# Altium PCB Main_Board.PcbDoc (part 6 of 14)
Units mm, origin at the board's own origin, x right, y up, seen from the top; angles counter-clockwise.
Board outline 142 x 82 mm, 10 copper layers (L1_Top, L2_PWR1, L3_Sig1, L4_GND1, L5_Sig2, L6_Sig3, L7_GND2, L8_Sig4, L9_GND3, L8_Bottom), stack 1.71 mm thick; 299 components, 328 nets, 2329 pads, 2908 vias.
Unrouted connection lines stored in the file: 2.
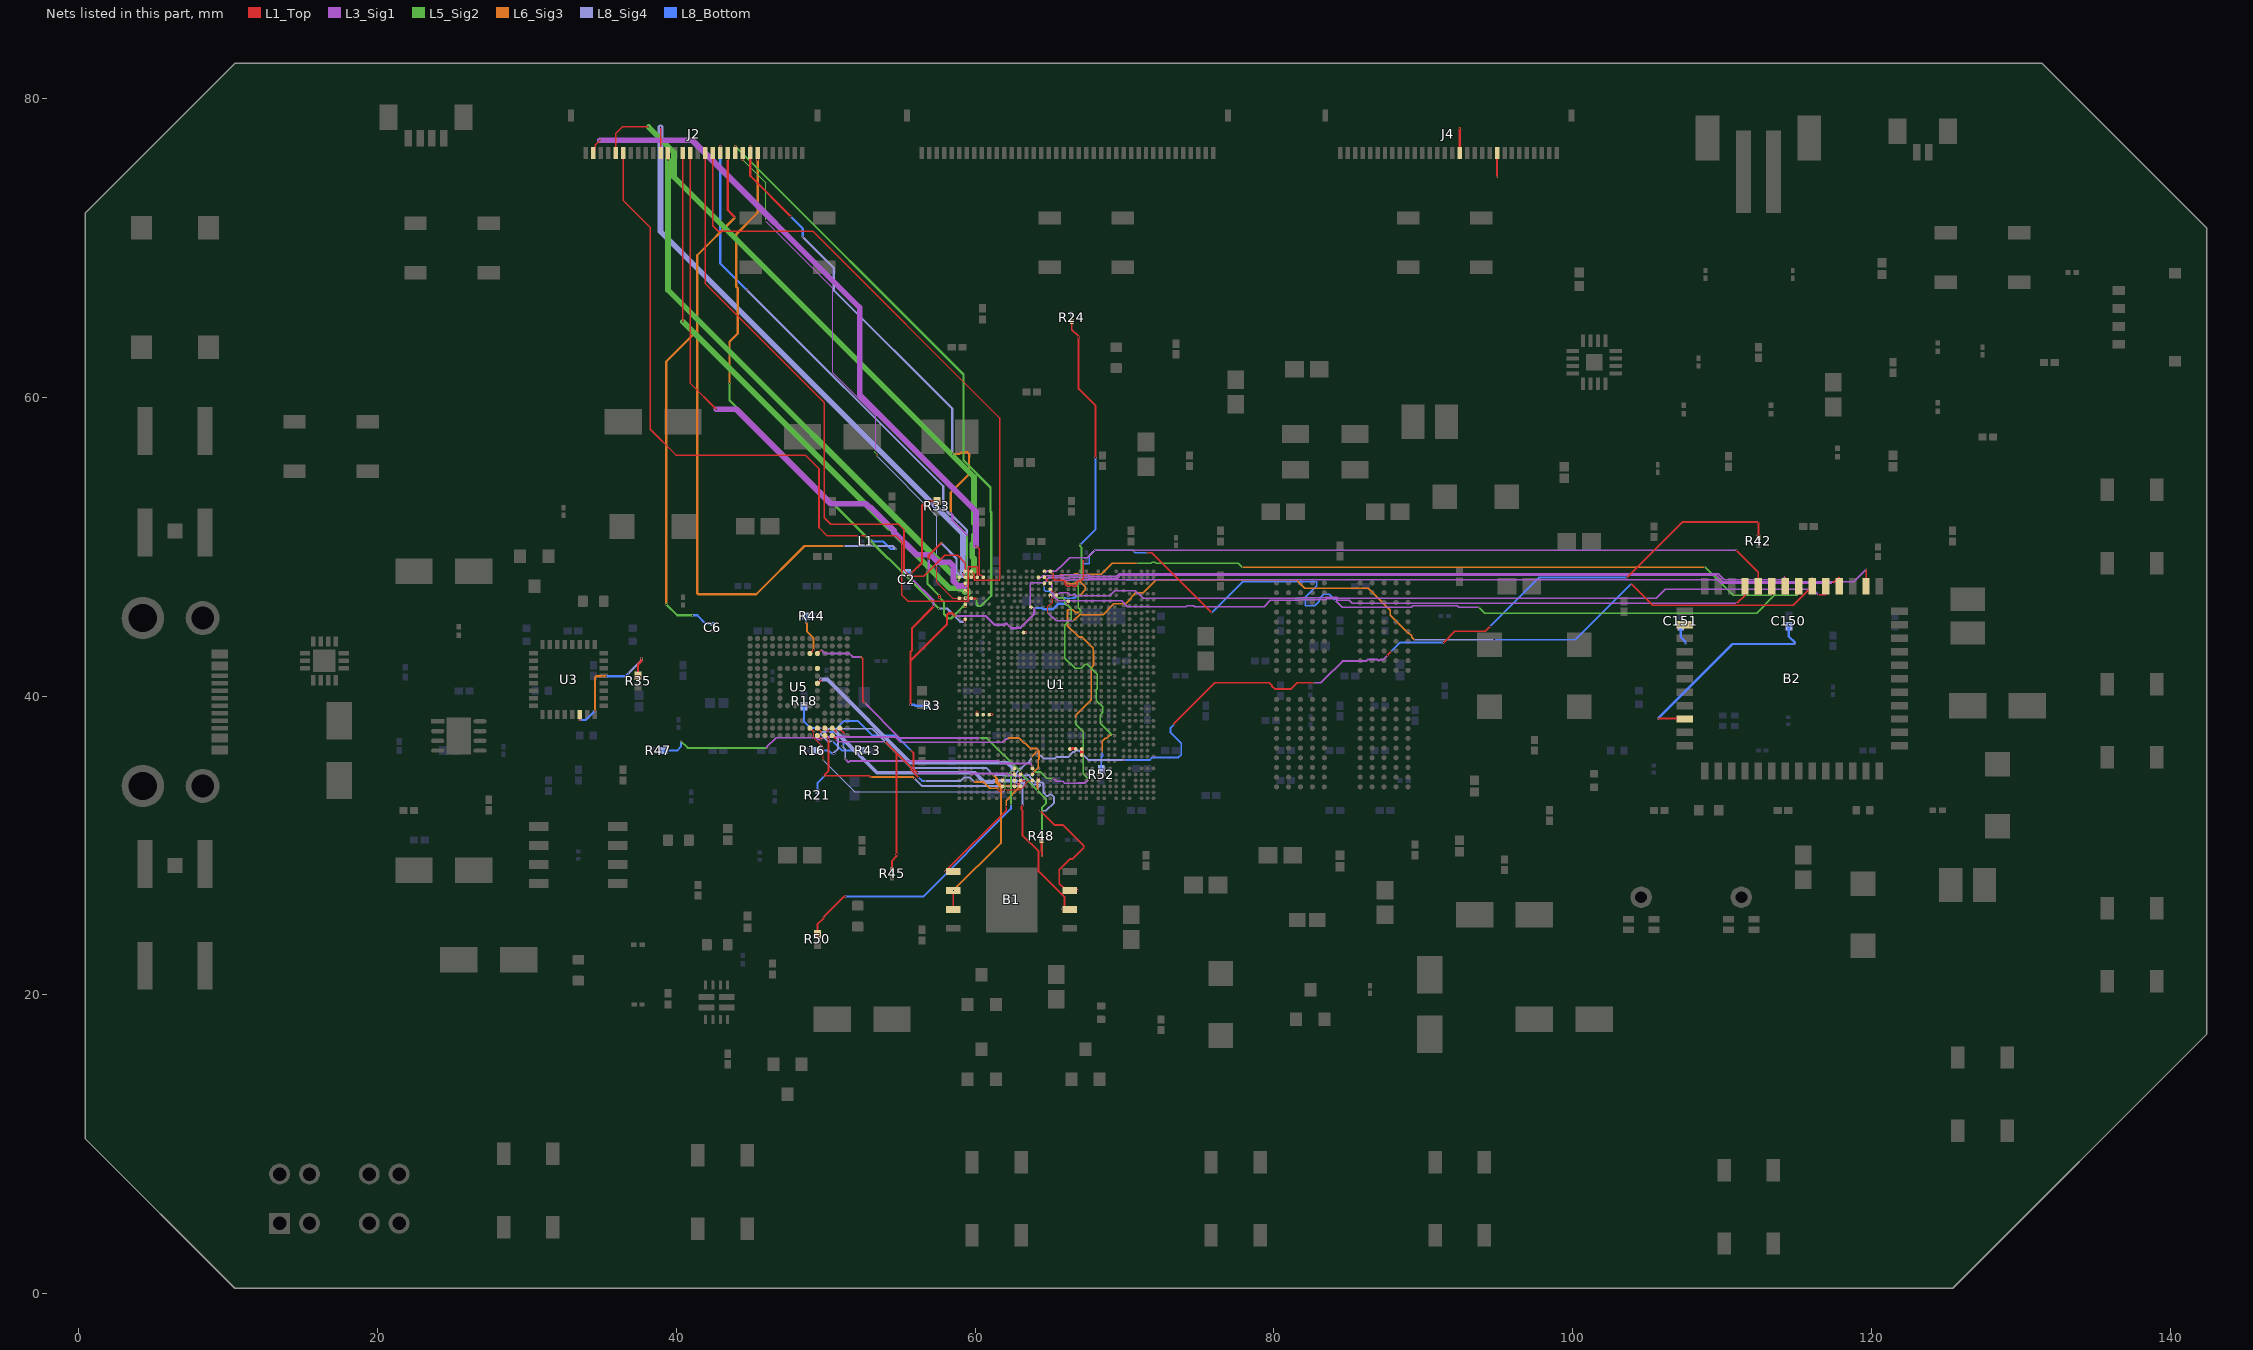
[diagram p14: the nets of this part, all layers, seen from the top]

## Footprints (in the part's own frame and the unit in brackets; to place one, negate y for a bottom-side part, rotate by r counter-clockwise, add the part's x,y. Pads: shape width x height; smd on the part's side, far side on the other; paste and mask are expansions set on the pad) (continued)
UFQFPN-32 [mm]
  rect 0.6x0.3 smd paste-0.15 mask+0: 1(-2.35,1.75) 2(-2.35,1.25) 3(-2.35,0.75) 4(-2.35,0.25) 5(-2.35,-0.25) 6(-2.35,-0.75) 7(-2.35,-1.25) 8(-2.35,-1.75) 17(2.35,-1.75) 18(2.35,-1.25) 19(2.35,-0.75) 20(2.35,-0.25) 21(2.35,0.25) 22(2.35,0.75) 23(2.35,1.25) 24(2.35,1.75)
  rect 0.3x0.6 smd paste-0.15 mask+0: 9(-1.75,-2.35) 10(-1.25,-2.35) 11(-0.75,-2.35) 12(-0.25,-2.35) 13(0.25,-2.35) 14(0.75,-2.35) 15(1.25,-2.35) 16(1.75,-2.35) 25(1.75,2.35) 26(1.25,2.35) 27(0.75,2.35) 28(0.25,2.35) 29(-0.25,2.35) 30(-0.75,2.35) 31(-1.25,2.35) 32(-1.75,2.35)
  silkscreen extent -2.93,-3.16 3.16,3.16, body extent -2.6,-2.6 2.6,2.6, height 1.4

## Part data
*: library part CMP-019-00062-1, "Full Speed Programmable USB Power Delivery Controller USB 3.1 3.3V T/R 14-Pin WQFN EP", Max Operating Temperature=85°C, Max Supply Voltage=5.5V, Min Operating Temperature=-40°C, Min Supply Voltage=2.7V, Mounting Technology="Surface Mount"
B1: library part CMP-043-000000-2, "256M-bit Serial Flash Memory with uniform 4KB sectors and Dual/Quad SPI", Manufacturer_Name=Winbond, Mouser Part Number=454-W25Q256JVEIQ, Arrow Part Number=W25Q256JVEIQ, Arrow Price/Stock=https://www.arrow.com/en/products/w25q256jveiq/winbond-electronics.html?utm_currency=USD&region=nac, Datasheet Link=https://www.winbond.com/hq/search-resource-file.jsp?partNo=W25Q256JVEIQ&type=datasheet, Design Item ID=W25Q256JVEIQ, Geometry.Height=0.8mm, Manufacturer_Part_Number=W25Q256JVEIQ, Mouser Price/Stock=https://www.mouser.co.uk/ProductDetail/Winbond/W25Q256JVEIQ?qs=qSfuJ%252Bfl%2Fd4o%2FNFUf7yCgA%3D%3D, Source=W25Q256JVEIQ.SchLib
B2: library part CMP-052-000000-2, "IEEE 802.11ax/ac/a/b/g/n 2x2 WiFi with Bluetooth5.0 Combo Sip Module", Manufacturer_Name=SparkLAN, Datasheet Link=https://www.mev-elektronik.com/files/MEV%20Elektronik%20Service/produkt-downloads/rf-microwave-wireless/download_AP6275S_datasheet_ver1.0_20191129%20(1).pdf, Design Item ID=AP6275S, Geometry.Height=1.55mm, Manufacturer_Part_Number=AP6275S, Source=AP6275S.SchLib
C1 C128 C137: library part CMP-001-00067-3, "Chip Capacitor, 100nF +/-20%, 50V, 0402, Thickness 0.6 mm", Case/Package=0402, Max Operating Temperature=85°C, Min Operating Temperature=-55°C, Tolerance=10%, Voltage Rating=50V, Mounting Technology=SMT, Pins=2
C2: library part CMP-001-00066-3, "Chip Capacitor, 1nF +/-20%, 50V, 0402, Thickness 0.33 mm", Case/Package=0402, Max Operating Temperature=85°C, Min Operating Temperature=-55°C, Tolerance=10%, Voltage Rating=50V, Mounting Technology=SMT, Pins=2
C3: library part CMP-001-00103-1, "Cap Ceramic 0.0047uF 10V X5R 10% Pad SMD 0201 85C Automotive T/R", Case/Package=0201, Max Operating Temperature=85°C, Min Operating Temperature=-55°C, Tolerance=10%, Voltage Rating=10V, Mounting Technology="Surface Mount"
C4: library part CMP-001-00105-1, "10V 1uF X5R ±20% 0201 Multilayer Ceramic Capacitors MLCC - SMD/SMT ROHS", Case/Package=0201, Max Operating Temperature=85°C, Min Operating Temperature=-55°C, Tolerance=20%, Mounting Technology="Surface Mount"
C5 C13: library part CMP-001-00061-3, "Chip Capacitor, 100nF +/-20%, 10V, 0402, Thickness 0.6 mm", Case/Package=0402, Max Operating Temperature=85°C, Min Operating Temperature=-55°C, Tolerance=20%, Voltage Rating=10V, Mounting Technology=SMT, Pins=2
C6: library part CMP-001-00106-1, "50V 10pF C0G ±1% 0201 Multilayer Ceramic Capacitors MLCC - SMD/SMT ROHS", Case/Package=0201, Max Operating Temperature=125°C, Min Operating Temperature=-55°C, Tolerance=1%, Voltage Rating=50V, Mounting Technology="Surface Mount"
C7 C8: library part CMP-001-00063-3, "Chip Capacitor, 1µF +/-20%, 10V, 0402, Thickness 0.6 mm", Case/Package=0402, Max Operating Temperature=85°C, Min Operating Temperature=-55°C, Tolerance=10%, Voltage Rating=10V, Mounting Technology=SMT, Pins=2
C9: library part CMP-001-00104-1, "0201 (0603METRIC) Ceramic Capacitor SMD Comm C0G 25V 15PF ±5% C0G NP0", Case/Package=0201, Max Operating Temperature=125°C, Min Operating Temperature=-55°C, Tolerance=5%, Voltage Rating=25V, Mounting Technology="Surface Mount"
C10: library part CMP-001-00108-1, "10V 2.2uF X5R ±20% 0201 Multilayer Ceramic Capacitors MLCC - SMD/SMT ROHS", Case/Package=0201, Max Operating Temperature=85°C, Min Operating Temperature=-55°C, Voltage Rating=10V, Mounting Technology="Surface Mount"
C11 C12 C130 C138: library part CMP-001-00107-1, "0201 4.7 uF 6.3 V ±10 % Tolerance X5R SMT Multilayer Ceramic Chip Capacitor", Case/Package=0201, Max Operating Temperature=85°C, Min Operating Temperature=-55°C, Tolerance=20%, Voltage Rating=6.3V, Mounting Technology="Surface Mount"
C14 C15: library part CMP-001-00114-1, "CAP CER 12PF 50V C0G/NP0 0201 / 12 pF ±1% 50V Ceramic Capacitor C0G, NP0 0201 (0603 Metric)", Case/Package=0201, Max Operating Temperature=125°C, Min Operating Temperature=-55°C, Tolerance=1%, Voltage Rating=50V, Mounting Technology="Surface Mount"
C16 C26 C34 C35 C42 C57 C65 C73 C83 C91 C99 C107 C115 C124: library part CMP-001-00109-1, "CAP CER 10UF 4V X5R 0402 / 10 µF ±20% 4V Ceramic Capacitor X5R 0402 (1005 Metric)", Case/Package=0402, Max Operating Temperature=85°C, Min Operating Temperature=-55°C, Tolerance=20%, Voltage Rating=4V, Mounting Technology="Surface Mount"
C17 C18 C32 C33 C37 C44 C45 C46 C80 C131: library part CMP-001-00111-1, "10V 1uF X5R ±20% 0201 Multilayer Ceramic Capacitors MLCC - SMD/SMT ROHS", Case/Package=0201, Max Operating Temperature=85°C, Min Operating Temperature=-55°C, Tolerance=20%, Mounting Technology="Surface Mount"
C19 C20 C23 C27 C28 C29 C30 C31 C38 C39 C40 C47 C48 C49 C50 C51 C52 C53 C54 C58 C59 C60 C61 C62 C66 C67 C68 C69 C70 C74 C75 C76 C77 C78 C79 C84 C85 C86 C87 C88 C92 C93 C94 C95 C96 C100 C101 C102 C103 C104 C108 C109 C110 C111 C112 C116 C117 C118 C119 C120 C122 C123 C125 C132 C133 C142 C144 C149 C150 C151: library part CMP-001-00112-1, "16V 100nF X5R ±10% 0201 Multilayer Ceramic Capacitors MLCC - SMD/SMT ROHS", Case/Package=0201, Max Operating Temperature=85°C, Min Operating Temperature=-55°C, Tolerance=10%, Voltage Rating=16V, Mounting Technology="Surface Mount"
C21 C22 C36 C43: library part CMP-001-00110-1, "6.3V 4.7uF X5R ±20% 0402 Multilayer Ceramic Capacitors MLCC - SMD/SMT ROHS", Case/Package=0402, Max Operating Temperature=85°C, Min Operating Temperature=-55°C, Tolerance=20%, Voltage Rating=6.3V, Mounting Technology="Surface Mount"
C24 C25 C41 C55 C56 C63 C64 C71 C72 C81 C82 C89 C90 C97 C98 C105 C106 C113 C114: library part CMP-001-00097-1, "6.3V 22uF X5R ±20% 0603 Multilayer Ceramic Capacitors MLCC - SMD/SMT ROHS", Case/Package=0603, Max Operating Temperature=85°C, Min Operating Temperature=-55°C, Tolerance=20%, Voltage Rating=6.3V, Mounting Technology="Surface Mount"
C121: library part CMP-001-00115-1, "10V 2.2uF X5R ±20% 0201 Multilayer Ceramic Capacitors MLCC - SMD/SMT ROHS", Case/Package=0201, Max Operating Temperature=85°C, Min Operating Temperature=-55°C, Voltage Rating=10V, Mounting Technology="Surface Mount"
C126 C127: library part CMP-001-00102-1, "25V 22pF C0G ±1% 0201 Multilayer Ceramic Capacitors MLCC - SMD/SMT ROHS", Case/Package=0201, Max Operating Temperature=125°C, Min Operating Temperature=-55°C, Tolerance=1%, Voltage Rating=25V, Mounting Technology="Surface Mount"
C129 C141 C143: library part CMP-001-00074-3, "Chip Capacitor, 10µF +/-40%, 6.3V, 0402, Thickness 0.6 mm", Case/Package=0402, Max Operating Temperature=85°C, Min Operating Temperature=-55°C, Tolerance=10%, Voltage Rating=6.3V, Mounting Technology=SMT, Pins=2
C134 C135 C136 C145 C146 C148: library part CMP-001-00075-4, "Chip Capacitor, 10µF +/-20%, 10V, 0603, Thickness 1 mm", Case/Package=0603, Max Operating Temperature=85°C, Min Operating Temperature=-55°C, Tolerance=10%, Voltage Rating=10V, Mounting Technology=SMT, Pins=2
C139 C140: library part CMP-001-00116-1, "0201 220 pF 16 V ±10 % Tolerance X7R Surface Mount Multilayer Ceramic Capacitor", Case/Package=0201, Max Operating Temperature=125°C, Min Operating Temperature=-55°C, Tolerance=10%, Voltage Rating=16V, Mounting Technology="Surface Mount", Pins=2
C147: library part CMP-001-00001-6, "Chip Capacitor, 0.1 uF, +/- 5%, 16 V, 0402 (1005 Metric)", Capacitor Type=Ceramic, Case/Package=0402, Max Operating Temperature=125°C, Min Operating Temperature=-55°C, Tolerance=5%, Voltage Rating=16V, Mounting Technology=SM, Pins=2, RoHS Compliant=True
D1 D2 D3 D4 D5 D6 D7 D8 D9 D10 D12: library part CMP-12791-000053-1, "DIODE SBR 45V 3A SMA", Average Rectified Current=3A, Case/Package=SMA, Forward Voltage=420mV, Max Forward Surge Current (Ifsm)=50A, Max Operating Temperature=150°C, Max Repetitive Reverse Voltage (Vrrm)=45V, Min Operating Temperature=-55°C, Package Quantity=5000, Peak Reverse Current=40mA, Element Configuration=Single, Lead Free="Lead Free", Max Reverse Voltage (DC)=45V, Mount="Surface Mount", Packaging="Tape and Reel", Weight=0.002258oz
D11 D13 D14 D15 D16 D17 D18: library part CMP-11424-155511901-1, "600 W Transient Voltage Suppressor"
J1: library part CMP-17439-000186-1, "CONN HEADER SMD 2POS 0.8MM", Color=Natural, Flammability Rating="UL94 V-0", Package Quantity=2500, Voltage Rating=30V, Connector Type=Header, Contact Finish - Mating=TIN, Contact Material="Copper Alloy", Contact Plating=Tin, Contact Shape=Rectangular, Contact Type="Outer Shroud Contact", Fastening Type=Pull, Insulation Color=Natural, Insulation Material=Nylon, Lead Free="Lead Free", Mated Stacking Heights=3.95mm, Mount="Surface Mount", Number of Positions=2, Number of Rows=1, Packaging="Cut Tape", Pitch=0.031inch, Series=SUR, Termination=Solder
J2 J4: library part CMP-002-00089-2, "30 Position FFC, FPC Connector Contacts, Top and Bottom 0.020\" (0.50mm) Surface Mount, Right Angle -55C ~ 105C,50V,0.5A", Manufacturer_Name=Hirose, Manufacturer_Part_Number=FH34SRJ-30S-0.5SH(99), Max Operating Temperature=105°C, Min Operating Temperature=-55°C, Mouser Part Number=798-FH34SRJ30S05SH99, Voltage Rating=50V, Connector Type=Receptacle, Datasheet Link=https://www.hirose.com/product/download/?distributor=digikey&type=2d&lang=en&num=FH34SRJ-30S-0.5SH(99), Design Item ID=FH34SRJ-30S-0.5SH_99_, Gender=Female, Geometry.Height=1.1mm, Mounting Technology="Surface Mount", Mouser Price/Stock=https://www.mouser.co.uk/ProductDetail/Hirose-Connector/FH34SRJ-30S-0.5SH99?qs=%252BAZVS4b%2FkgI%2FlSMlYGcT5g%3D%3D, Pins=30, Source=FH34SRJ-30S-0.5SH_99_.SchLib
J3: library part CMP-002-00090-2, "40 Position FFC, FPC Connector Contacts, Top and Bottom 0.020\" (0.50mm) Surface Mount, Right Angle", Manufacturer_Name=Hirose, Manufacturer_Part_Number=FH34SRJ-40S-0.5SH(50), Mouser Part Number=798-FH34SRJ40S05SH50, Datasheet Link=https://www.hirose.com/en/product/document?clcode=CL0580-1260-6-50&productname=FH34SRJ-40S-0.5SH(50)&series=FH34SRJ&documenttype=2DDrawing&lang=en&documentid=0001483059, Design Item ID=FH34SRJ-40S-0.5SH_50_, Geometry.Height=1.1mm, Mouser Price/Stock=https://www.mouser.co.uk/ProductDetail/Hirose-Connector/FH34SRJ-40S-0.5SH50?qs=iyLo5FA4poDa6AcLdJDWMw%3D%3D, Source=FH34SRJ-40S-0.5SH_50_.SchLib
J5: library part CMP-002-00091-2, "Molex PICO-EZMATE 78171, 1.2mm Pitch, 4 Way, 1 Row, Straight PCB Header, Surface Mount", Manufacturer_Name=Molex, Max Operating Temperature=85°C, Min Operating Temperature=-25°C, Mouser Part Number=538-78171-0004, Voltage Rating=50V, Datasheet Link=https://www.molex.com/pdm_docs/sd/781710004_sd.pdf, Design Item ID=78171-0004, Gender=Male, Geometry.Height=1.6mm, Manufacturer_Part_Number=78171-0004, Mouser Price/Stock=https://www.mouser.co.uk/ProductDetail/Molex/78171-0004?qs=rg3U%2F5nEhHfTM3gyKulQEQ%3D%3D, Pins=4, Source=78171-0004.SchLib
J6: library part CMP-002-00094-1, "Connector Header Surface Mount 4 position 0.031 (0.80mm)", Case/Package=None, Check_prices=https://www.snapeda.com/parts/BM04B-SURS-TF(LF)(SN)/JST/view-part/?ref=eda, Component Type=Standard, Design Item ID=BM04B-SURS-TF(LF)(SN), MF="JST Sales America Inc.", MP=BM04B-SURS-TF(LF)(SN), Pins=6, SnapEDA_Link=https://www.snapeda.com/parts/BM04B-SURS-TF(LF)(SN)/JST/view-part/?ref=snap, Source=BM04B-SURS-TF(LF)(SN).SchLib
J7: library part CMP-061-000000-2, "3A 1 Sink panel 16P Female -25~+85 Type-C SMD USB Connectors ROHS", Manufacturer_Name=hanxia, Datasheet Link=https://www.lcsc.com/datasheet/lcsc_datasheet_2211161000_HCTL-HC-TYPE-C-16P-CB1-0_C2894901.pdf, Design Item ID=HC-TYPE-C-16P-CB1.0, Geometry.Height=3.36mm, Manufacturer_Part_Number=HC-TYPE-C-16P-CB1.0, Source=HC-TYPE-C-16P-CB1.0.SchLib
J8: library part CMP-2000-05163-2, "CONN HEADER SMD 2POS 2MM", Color=White, Contact Resistance=20mR, Current Rating=2A, Flammability Rating="UL94 V-0", Housing Color=Beige, Insulation Color=Natural, Insulation Resistance=1GR, Max Operating Temperature=85°C, Max Voltage Rating (AC)=100V, Min Operating Temperature=-25°C, Connector Type=Header, Contact Finish - Mating=TIN, Contact Material="Copper Alloy", Contact Mating Length=0.13inch, Contact Plating=Tin, Contact Shape=Square, Contact Type="Male Pin", Depth=5mm, Fastening Type=Detent, Gender=Male, Height=9.4mm, Housing Material=Polyamide, Insulation Material=Nylon, Lead Free="Lead Free", Lead Pitch=2mm, Length=7.95mm, Mated Stacking Heights=8.6mm, Max Current Rating=2A, Mount="Surface Mount", Number of Contacts=2, Number of Poles=2, Number of Positions=2, Number of Rows=1, Orientation=Straight, Packaging="Tape and Reel", Pitch=2mm, REACH SVHC="No SVHC", Series=PH, Termination=Solder, Voltage Rating=100V, Voltage Rating (AC)=100V, Width=5.5mm, Working Voltage=100V
L1: library part CMP-06042-000419-1, "Film type RF Inductor 110nH ±3% 80mA 12Ω 0201 (0603)", Case Code (Imperial)=0201, Case Code (Metric)=0603, Current Rating=80mA, DC Resistance (DCR)=12R, Inductance=110nH, Max Operating Temperature=125°C, Min Operating Temperature=-55°C, Package Quantity=15000, Resistor Type="Thin Film", Self Resonant Frequency=800MHz, Test Frequency=300MHz, Tolerance=3%, Case/Package=0201, Core Material=Non-Magnetic, Height=0.3mm, Height - Seated (Max)=0.013inch, Length=0.024inch, Max DC Current=80mA, Mount="Surface Mount", Packaging="Tape and Reel", Q Factor=8, Shielding=Unshielded, Termination=SMD/SMT, Weight=6E-06oz, Width=0.012inch
L2 L3: library part CMP-006-00026-1, "Inductor Power Chip Shielded Multi-Layer 2.2uH 20% 1MHz Ferrite 1A 0.15Ohm DCR 1008 T/R", Case/Package=1008, Current Rating=1A, Max Operating Temperature=125°C, Min Operating Temperature=-55°C, Self Resonant Frequency=40MHz, Tolerance=20%, Max Current Rating=1A, Mounting Technology="Surface Mount"
L4 L5: library part CMP-06042-016476-1, "Multilayer Type Inductor for Power Lines, 1008 (2520), 2.2μH, 20%, 0.15Ω, 1000mA", Case Code (Imperial)=1008, Case Code (Metric)=2520, Current=140mA, Current Rating=1A, DC Resistance (DCR)=120mR, Inductance=2.2uH, Inductance Tolerance=20%, Max Operating Temperature=125°C, Min Operating Temperature=-55°C, Package Quantity=1, Self Resonant Frequency=40MHz, Test Frequency=1MHz, Case/Package=1008, Core Material=Ferrite, DC Current=1A, Depth=2.2mm, Height=1.1mm, Lead Free="Lead Free", Length=2.5mm, Max DC Current=1A, Military Standard=Not, Mount="Surface Mount", Packaging="Tape and Reel", Radiation Hardening=No, Rated Current-Max=1A, REACH SVHC="No SVHC", Series=LQM2HP_J0, Shielding=Shielded, Termination=SMD/SMT, Tolerance=20%, Width=2mm
L6: library part CMP-006-00027-1, "General Purpose Inductor, 10uH, 20%, 1 Element, Ferrite-Core, Reflow soldering, , 1608/0603", Case/Package=0603, Current Rating=100mA, Max Current Rating=300mA, Max Operating Temperature=125°C, Min Operating Temperature=-55°C, Self Resonant Frequency=32MHz, Tolerance=20%
L7: library part CMP-06042-017052-1, "Multilayer type Inductor for Power Lines 10uH ±20% @1MHz, 300mA, Max DCR 1.365Ω, SRF 32MHz"
Q1 Q2: library part CMP-12801-000067-1, "MOSFET N-CH 30V 5.8A SOT23", Continuous Drain Current=5.8A, Drain To Source Breakdown Voltage=30V, Drain To Source Resistance=21mΩ, Gate To Source Voltage=12V, Input Capacitace At Vds="570pF @ 15V", Manufacturer=Diodes, Max Forward Diode Voltage=1.2V, Max Junction Temp=+150°C, Package=SOT23, Power Dissipation=0.72W, Pulse Drain Current=30A, Temperature="-55°C to +150°C", Temperature Range Low=-55°C, Typ Forward Diode Voltage=0.7V, Automotive=No, Category=Trans, ComponentLink2Description=Datasheet, ComponentLink2URL=https://www.diodes.com/assets/Datasheets/DMN3042L.pdf, Depletion Mode=False, Device Class L1="Discrete Semiconductors", Device Class L2=Transistors, Device Class L3=MOSFETs, Digikey Description="MOSFET N-CH 30V 5.8A SOT23", Drain To Source Voltage=30V, Footprint Url=https://www.diodes.com/assets/Package-Files/SOT23.pdf, Gate Charge At Vgs="13.3nC @ 10V", Height=1.1mm, Lead Free=Yes, Manufacturer Part Number=DMN3042L-13, Mouser Description="MOSFET 30V N-Ch Enh Mode 26.5mOhm 12Vgs 570pF", Number Of Channels=1, Number Of N Channels=1, Octopart=https://octopart.com/dmn3042l-13-diodes+inc.-57605025, Reverse Recovery Charge=1.9nC, Reverse Recovery Time=7.8ns, RoHS=TRUE, Rthja Max=171°C/W, Standoff Height=0.013mm, Temperature Range High=+150°C, Threshold Vgs Max=1.4V, Threshold Vgs Min=0.6V, Turn Off Delay Time=13.9ns, Turn On Delay Time=1.5ns
Q3 Q4 Q5 Q6: library part CMP-013-00042-1, "720mW(Ta) 12V 1.4V@ 250", Case/Package=TO-236-3, Max Operating Temperature=150°C, Min Operating Temperature=-55°C, Mounting Technology="Surface Mount"
R1 R4 R60 R64: library part CMP-009-00212-1, "Res Thick Film 0201 100 Ohm 5% 0.05W(1/20W) ±200ppm/C Pad SMD Automotive T/R", Case/Package=0201, Max Operating Temperature=155°C, Min Operating Temperature=-55°C, Tolerance=5%, Voltage Rating=25V, Mounting Technology="Surface Mount"
R2: library part CMP-009-00206-1, "Fixed Resistor, Metal Glaze/thick Film, 0.05W, 3.3ohm, 25V, 5% +/-Tol, 400ppm/Cel, Surface Mount, 0201", Case/Package=0201, Max Operating Temperature=155°C, Min Operating Temperature=-55°C, Tolerance=5%, Voltage Rating=25V, Mounting Technology="Surface Mount"
R3: library part CMP-009-00208-1, "Res General Purpose Thick Film 0201 1k Ohm 1% 1/20W ±200ppm/°C Molded Paper T/R", Case/Package=0201, Max Operating Temperature=125°C, Min Operating Temperature=-55°C, Tolerance=1%, Voltage Rating=25V
R5 R21 R24 R31 R36 R62 R63 R70 R77 R78 R79: library part CMP-009-00230-1, "Resistor Jumper Metal Plate 0201 0 Ohm Molded SMD Paper T/R", Case/Package=0201, Max Operating Temperature=155°C, Min Operating Temperature=-55°C, Mounting Technology="Surface Mount"
R6 R43 R44 R52 R53 R54 R56: library part CMP-009-00226-1, "Resistor Thick Film 0201 22 Ohm 5% 1/20W 200ppm/C Molded SMD Paper T/R", Case/Package=0201, Max Operating Temperature=155°C, Min Operating Temperature=-55°C, Tolerance=5%, Voltage Rating=30V, Mounting Technology="Surface Mount", Pins=2
R11: library part CMP-009-00232-1, "Res Thick Film 0201 2.26K Ohm 1% 1/20W ±200ppm/°C Molded SMD SMD T/R", Case/Package=0201, Max Operating Temperature=125°C, Min Operating Temperature=-55°C, Tolerance=1%, Voltage Rating=25V, Mounting Technology="Surface Mount"
R14 R15 R17 R27 R28 R29 R30 R32 R34 R37 R38 R39 R40 R42 R45 R48 R51 R57 R61 R68: library part CMP-009-00210-1, "Fixed Resistor, Thin Film, 0.05W, 10000ohm, 25V, 0.1% +/-Tol, 50ppm/Cel, Surface Mount, 0201", Case/Package=0201, Max Operating Temperature=125°C, Min Operating Temperature=-55°C, Tolerance=0.1%, Voltage Rating=25V, Mounting Technology="Surface Mount"
R16 R18 R41 R46 R47 R49: library part CMP-009-00207-1, "Res Thick Film 0201 4.7K Ohm 5% 0.05W(1/20W) ±200ppm/C Pad SMD Automotive T/R", Case/Package=0201, Max Operating Temperature=155°C, Min Operating Temperature=-55°C, Tolerance=5%, Voltage Rating=25V, Mounting Technology="Surface Mount"
R19: library part CMP-009-00227-1, "CRCW FIXED RESISTOR 0201 (0603Metric) Chip Resistor ±5% ±200ppm/C 56kOhm 0.05W 1/20W", Case/Package=0201, Max Operating Temperature=155°C, Min Operating Temperature=-55°C, Tolerance=5%, Voltage Rating=30V, Mounting Technology="Surface Mount"
R20 R23: library part CMP-009-00231-1, "Res Thick Film 0201 2K Ohm 5% 0.05W(1/20W) ±200ppm/C Pad SMD Automotive T/R", Case/Package=0201, Max Operating Temperature=155°C, Min Operating Temperature=-55°C, Tolerance=5%, Voltage Rating=25V, Mounting Technology="Surface Mount"
R22 R26 R33 R35 R72: library part CMP-009-00229-1, "Res Thick Film 0201 100 Ohm 5% 0.05W(1/20W) ±200ppm/C Pad SMD Automotive T/R", Case/Package=0201, Max Operating Temperature=155°C, Min Operating Temperature=-55°C, Tolerance=5%, Voltage Rating=25V, Mounting Technology="Surface Mount"
R25: library part CMP-009-00228-1, "CRCW FIXED RESISTOR 0201 (0603Metric) Chip Resistor ±5% ±200ppm/C 39kOhm 0.05W 1/20W", Case/Package=0201, Max Operating Temperature=155°C, Min Operating Temperature=-55°C, Tolerance=5%, Voltage Rating=30V, Mounting Technology="Surface Mount"
R50 R58 R59: library part CMP-010-00030-1, "Res Thick Film 0201 47K Ohm 5% 0.05W(1/20W) ±200ppm/C Pad SMD Automotive T/R", Case/Package=0201, Max Operating Temperature=155°C, Min Operating Temperature=-55°C, Mounting Technology="Surface Mount"
R55: library part CMP-009-00220-1, "50mW Thick Film Resistors ±1% ±200ppm/℃ 499Ω 0201 Chip Resistor - Surface Mount ROHS", Case/Package=0201, Max Operating Temperature=155°C, Min Operating Temperature=-55°C, Tolerance=1%, Voltage Rating=25V, Mounting Technology="Surface Mount"
R65 R69: library part CMP-009-00205-1, "Res General Purpose Thick Film 0201 100k Ohm 1% 1/20W ±200ppm/°C Molded Paper T/R", Case/Package=0201, Max Operating Temperature=155°C, Min Operating Temperature=-55°C, Tolerance=1%, Voltage Rating=25V, Mounting Technology="Surface Mount"
R66: library part CMP-009-00235-1, "Res Thick Film 0201 22K Ohm 5% 0.05W(1/20W) ±200ppm/C Pad SMD T/R", Case/Package=0201, Max Operating Temperature=155°C, Min Operating Temperature=-55°C, Tolerance=5%, Voltage Rating=30V, Mounting Technology="Surface Mount"
R67 R71 R73: library part CMP-009-00233-1, "CRCW FIXED RESISTOR 0201 (0603Metric) Chip Resistor ±5% ±200ppm/C 5.1kOhm 0.05W 1/20W", Case/Package=0201, Max Operating Temperature=155°C, Min Operating Temperature=-55°C, Tolerance=5%, Voltage Rating=30V, Mounting Technology="Surface Mount"
R74: library part CMP-009-00234-1, "Res Thick Film 0201 13K Ohm 5% 0.05W(1/20W) ±200ppm/C Pad SMD T/R", Case/Package=0201, Max Operating Temperature=155°C, Min Operating Temperature=-55°C, Tolerance=5%, Voltage Rating=25V, Mounting Technology="Surface Mount"
R75 R76: library part CMP-009-00236-1, "Res Thick Film 0201 2.2 Ohm 5% 0.05W(1/20W) ±400ppm/C Pad SMD T/R Automotive AEC-Q200", Case/Package=0201, Max Operating Temperature=155°C, Min Operating Temperature=-55°C, Tolerance=5%, Voltage Rating=25V, Mounting Technology="Surface Mount"
SW1 SW2: library part CMP-05618-000002-1, "SWITCH TACTILE SPST-NO 0.02A 15V", Contact Current Rating=20mA, Contact Resistance=100mΩ, Manufacturer="Panasonic Electronic Components", Operating Force=1N, Package=0, Temperature="-40°C to +85°C", Temperature Range High=+85°C, Temperature Range Low=-40°C, Voltage Rating Dc=15V, Automotive=No, Category=Switch, ComponentLink2Description=Datasheet, ComponentLink2URL=https://industrial.panasonic.com/ac/cdn/e/control/switch/light-touch/catalog/sw_lt_eng_6s_th.pdf, Device Class L1=Electromechanical, Device Class L2=Switches, Device Class L3="Tactile Switches", Digikey Description="SWITCH TACTILE SPST-NO 0.02A 15V", Electromechanical Life=1000000Cycles, Height=3.3mm, Lead Free=Yes, Manufacturer Part Number=EVQ-Q2H03W, Mount="Surface Mount", Mouser Description="Switch Tactile ON OFF SPST Round Button J-Bend 0.02A 15VDC 1N SMD Embossed T/R", Octopart=https://octopart.com/evq-q2h03w-panasonic-1368538, RoHS=TRUE, Throw Configuration=SPST-NO
SW3: library part CMP-08834-000024-1, "SWITCH TACTILE SPST-NO 0.05A 24V", Actuator Color=Beige, Case/Package=SMD/SMT, Contact Resistance=100mR, Current Rating=50mA, Max Operating Temperature=70°C, Max Voltage Rating (DC)=24V, Min Operating Temperature=-20°C, Operating Force=1.47N, Package Quantity=1, Actuator Length=1.7mm, Actuator Type=Standard, Contact Plating=Silver, Depth=8mm, Electrical Life=300000Cycles, Illumination Type=Non-Illuminated, Length=6.3mm, Max Current Rating=50mA, Mechanical Life=300000Cycles, Mount="Surface Mount", Orientation=Straight, Packaging="Tape and Reel", Radiation Hardening=No, RoHS Compliant=Yes, Series=B3FS, Switch Function=Off-Mom, Switch Travel=0.25mm, Termination="Gull Wing", Throw Configuration=SPST, Voltage Rating (DC)=24V, Weight=0.2g
SW4: library part CMP-10038-000017-1, "SWITCH SLIDE DP3T 300MA 6V", Actuator Color=Black, Contact Current Rating=300mA, Contact Resistance=70mR, Flammability Rating="UL94 V-2", Max Operating Temperature=85°C, Max Voltage Rating (DC)=6V, Min Operating Temperature=-20°C, Package Quantity=1, Actuator Material=Nylon, Actuator Type=Standard, Contact Material="Copper Alloy", Contact Plating=Silver, Depth=5.6mm, Electrical Life=15000Cycles, Housing Material=Nylon, Length=13mm, Max Current Rating=300mA, Mount="Through Hole", Orientation="Right Angle", Packaging=Tray, Radiation Hardening=No, Series=JS, Switch Function=On-On-On, Termination="PC Pins", Throw Configuration=DP3T
U1: library part CMP-020-00029-1, "he Amlogic A311D2 features four Cortex-A73 cores, four Cortex-A53 cores, and a more powerful Mali-G52 MP8 (8EE) GPU that supports OpenGL ES 3.2, Vulkan 1.1, and 0penCL 2.0 graphics programs", Case/Package=FCBGA, Clock Frequency=24MHz, Frequency=2GHz, Max Operating Temperature=105°C, Max Supply Voltage=105V, Min Operating Temperature=-70°C, Min Supply Voltage=-70V, RAM Size=8-16GB
U2: library part CMP-10083-000010-1, "IC RTC CLK/CALENDAR I2C 8-SOIC", Ambient Temperature Range High=+85°C, Ambient Temperature Range Low=-40°C, Frequency=400kHz, Manufacturer=NXP, Max Supply Voltage=5.5V, Min Supply Voltage=1V, Nominal Supply Current=0.225-0.95uA, Package=SOT96-1, Temperature="-40°C to +85°C", Automotive=No, Category=IC, ComponentLink2Description=Datasheet, ComponentLink2URL=https://www.nxp.com/docs/en/data-sheet/PCF8563.pdf, Device Class L1="Integrated Circuits (ICs)", Device Class L2="Clock and Timing", Device Class L3="Real Time Clocks", Digikey Description="IC RTC CLK/CALENDAR I2C 8-SOIC", Footprint Url=https://www.nxp.com/docs/en/package-information/SOT96-1.pdf, Height=1.75mm, Interface=I2C,2-Wire, Lead Free=Yes, Manufacturer Part Number=PCF8563T/5,518, Mouser Description="Real Time Clock Binary I2C 1-5V RTC IC", Number Of Outputs=1, Octopart=https://octopart.com/pcf8563t%2F5%2C518-nxp+semiconductors-19647995, RoHS=TRUE, Standoff Height=0.1mm, Temperature Range High=+85°C, Temperature Range Low=-40°C
U3: library part CMP-031-00007-2, "Mainstream Arm Cortex-M0+ MCU with 32 Kbytes of Flash memory, 8 Kbytes RAM, 64 MHz CPU, 2x USART, timers, ADC, comm. I/F, 1.7-3.6V", Manufacturer_Name=STMicroelectronics, Max Operating Temperature=85°C, Max Supply Voltage=3.6V, Min Operating Temperature=-40°C, Min Supply Voltage=1.7V, Copyright="Copyright (C) 2026 Ultra Librarian. All rights reserved.", Design Item ID=STM32G031K6U6, Manufacturer_Part_Number=STM32G031K6U6, RefDes=RefDes, Source=STM32G031K6U6.SchLib, Type=Type
U4: library part CMP-038-000000-3, "IC DRAM 32GBIT 2133MHZ 200VFBGA", Arrow Part Number="MT53D1024M32D4DT-046 AIT:D", Clock Frequency=2.1367GHz, Manufacturer_Name=Micron, Max Operating Temperature=95°C, Max Supply Voltage=1.17V, Min Operating Temperature=-40°C, Min Supply Voltage=1.06V, Mouser Part Number=340-343901-TRAY, Arrow Price/Stock=https://www.arrow.com/en/products/mt53d1024m32d4dt-046aitd/micron-technology, Datasheet Link=https://www.arrow.com/en/products/mt53d1024m32d4dt-046aitd/micron-technology, Design Item ID=MT53D1024M32D4DT-046_AIT_D, Geometry.Height=0.95mm, Manufacturer_Part_Number="MT53D1024M32D4DT-046 AIT:D", Mouser Price/Stock=https://www.mouser.com/Search/Refine.aspx?Keyword=340-343901-TRAY, Source=MT53D1024M32D4DT-046_AIT_D.SchLib
U5: library part CMP-040-000000-1, "SAMSUNG eÂ·MMC is an embedded MMC solution designed in a BGA package form", Package=Package, Check_prices=https://www.snapeda.com/parts/KLMAG2GEND-B031/Samsung/view-part/?ref=eda, Component Type=Standard, Design Item ID=KLMAG2GEND-B031, MF=Samsung, MP=KLMAG2GEND-B031, Pin Count=33, SnapEDA_Link=https://www.snapeda.com/parts/KLMAG2GEND-B031/Samsung/view-part/?ref=snap, Source=KLMAG2GEND-B031.SchLib
U6: library part CMP-0339-00011-3, "IC OR CTRLR SRC SELECT 8SON", Case/Package=TSSOP, Current - Output 2=1.25A, Max Input Voltage=5.5V, Max Operating Temperature=85°C, Max Power Dissipation=2.5W, Max Supply Current=55uA, Min Input Voltage=2.8V, Min Operating Temperature=-40°C, On-State Resistance=150mR, Package Quantity=3000, Lead Free="Lead Free", Max Output Current=1.25A, Number of Inputs=2, Number Of Outputs=1, Number of Pins=8, Operating Supply Current=55uA, Operating Supply Voltage=5.5V, Output Current=1.25A, Packaging="Tape and Reel", Radiation Hardening=No, REACH SVHC="No SVHC", Turn-Off Delay Time=5ms, Turn-On Delay Time=1ms, Weight=0.000847oz
U7: library part CMP-04910-000009-1, "PWR MGMT BATTERY MGMT", Manufacturer="Texas Instruments", Max Junction Temp=+125°C, Max Supply Voltage=22V, Min Supply Voltage=2.8V, Nominal Supply Current=300uA, Output Current=1.5-5.2A, Package=RUX0012A, Temperature="-40°C to +125°C", Temperature Range Low=-40°C, Automotive=No, Category=IC, ComponentLink2Description=Datasheet, ComponentLink2URL=https://www.ti.com/lit/ds/symlink/tps2121.pdf, Device Class L1="Integrated Circuits (ICs)", Device Class L2="Power Management ICs", Device Class L3=unset, Digikey Description="PWR MGMT BATTERY MGMT", Height=1mm, Lead Free=Yes, Manufacturer Part Number=TPS2121RUXR, Mouser Description="2.7-22V, 56m?, 4.5A, Priority Power MUX with Seamless Switchover 12-VQFN-HR -40 to 125", Number Of Outputs=1, Octopart=https://octopart.com/tps2121ruxr-texas+instruments-95511053, Output Voltage=22V, RoHS=TRUE, Standoff Height=0mm, Temperature Range High=+125°C
U8 U9 U10 U11 U13 U14 U17 U18 U19 U20 U21 U22 U23 U24 U25 U26: library part CMP-067-000000-1, "Intelligent control LED integrated light source", Package=None, Availability=Unavailable, Component Type=Standard, Design Item ID=WS2812B-B, MP=WS2812B-B, Pin Count=4, Price=None, Source=WS2812B-B.SchLib
U12: library part CMP-014-00003-2, "Tiny, Low-Cost, PCM Class D Amplifier with Class AB Performance", Case/Package="TQFN-16 Maxim", Max Operating Temperature=85°C, Max Supply Voltage=5.5V, Min Operating Temperature=-40°C, Min Supply Voltage=2.5V, Check_prices=https://www.snapeda.com/parts/MAX98357AETE+T/Analog+Devices/view-part/?ref=eda, Component Type=Standard, Design Item ID=MAX98357AETE+T, MF="Analog Devices", Mounting Technology="Surface Mount", MP=MAX98357AETE+T, Pins=16, SnapEDA_Link=https://www.snapeda.com/parts/MAX98357AETE+T/Analog+Devices/view-part/?ref=snap, Source=MAX98357AETE+T.SchLib
U15 U16: library part CMP-00196-121674314-1, "IM67D120AXTSA1 MEMS Microphone Omni-Directional -26dB 1.62V to 3.6V 5-Pin LLGA-5-4 Solder Pad T/R", NexarPartId=121674314
X1: library part CMP-003-00019-2, "Ceramic SMD Crystal, 24 MHz, +/- 20 ppm, 18 pF, -20 to 70 degC, 4-Pin SMD, RoHS, Tape and Reel", Case/Package=CSMD, Frequency=24MHz, Frequency Tolerance=20ppm, Load Capacitance=18pF, Manufacturer=Abracon, Max Operating Temperature=70°C, Min Operating Temperature=-20°C, Package Description="4-Pin Surface Mount Device, Body 5 x 3.2 mm", Package Quantity=1000, Package Reference=ABM3B, Resistance=50Ohm, Datasheet URL=http://www.abracon.com/Resonators/abm3b.pdf, Datasheet Version=Aug-15, ESR=50, Manufacturer URL=http://www.abracon.com/, Mounting Technology=SM, Packaging=TapeandReel, Pins=4, RoHS Compliant=True, Tolerance=20ppm
Y1: library part CMP-27762-015939-1, "Crystal 32.768kHz ±20ppm (Tol) 12.5pF FUND 90kΩ 2-Pin Mini-CSMD T/R", Case/Package=SMD/SMT, ESR (Equivalent Series Resistance)=90kR, Frequency=32.768kHz, Frequency Tolerance=20ppm, Load Capacitance=12.5pF, Max Operating Temperature=85°C, Min Operating Temperature=-40°C, Mount="Surface Mount", Packaging="Cut Tape", RoHS Compliant=Yes, Series=ABS06
Y2: library part CMP-27762-010000-1, "Crystal 37.4MHz ±10ppm 5pF SMD-4 1.2mm x 1mm", Case/Package=SMD/SMT, ESR (Equivalent Series Resistance)=50R, Frequency=37.4MHz, Frequency Stability=50ppm, Frequency Tolerance=10ppm, Load Capacitance=5pF, Max Operating Temperature=125°C, Min Operating Temperature=-40°C, Mount="Surface Mount", RoHS Compliant=Yes

## Via types
v1: diameter 0.1, hole 0.08, L1_Top to L8_Bottom, 1169 vias
v2: diameter 0.01, hole 0.01, L3_Sig1 to L8_Sig4, 433 vias
v3: diameter 0.01, hole 0.01, L8_Sig4 to L8_Bottom, 375 vias
v4: diameter 0.01, hole 0.01, L1_Top to L3_Sig1, 355 vias
v5: diameter 0.254, hole 0.01, L1_Top to L8_Bottom, 150 vias
v6: diameter 0.01, hole 0.01, L6_Sig3 to L8_Bottom, 129 vias
v7: diameter 0.05, hole 0.04, L1_Top to L8_Bottom, 104 vias
v8: diameter 0.01, hole 0.01, L1_Top to L5_Sig2, 89 vias
v9: diameter 0.01, hole 0.01, L1_Top to L8_Bottom, 41 vias
v10: diameter 0.1, hole 0.08, L1_Top to L3_Sig1, 17 vias
v11: diameter 0.1, hole 0.08, L1_Top to L5_Sig2, 11 vias
v12: diameter 0.1, hole 0.08, L8_Sig4 to L8_Bottom, 10 vias
v13: diameter 0.1, hole 0.08, L6_Sig3 to L8_Bottom, 9 vias
v14: diameter 1.27, hole 0.711, L1_Top to L8_Bottom, 8 vias
v15: diameter 0.4, hole 0.2, L1_Top to L8_Bottom, 4 vias
v16: diameter 0.05, hole 0.08, L1_Top to L8_Bottom, 3 vias
v17: diameter 0.05, hole 0.08, L6_Sig3 to L8_Bottom, 1 vias

## Nets (pads, with @x,y where several pads share a name; then routed paths per layer and width w, separated by ;. In a path a pad name is that pad's centre, name@x,y a point inside that pad or via, vN(x,y) a via of type N, cw(c..) or ccw(c..) an arc to the next point about the centre after c; other vN are vias at no path point)
ADC_CH3: U1.AD29
ADC_CH6: U1.AD28 | length 0.2
  L1_Top w0.203: U1.AD28@60.941,38.749 v1(61.116,38.749)
ADC_KEY: U1.AD30 | length 0.2
  L1_Top w0.203: U1.AD30@60.141,38.749 v1(60.141,38.924)
ANT0: B2.2 C151.1 | length 2.2
  L1_Top w0.152: v1(106.891,44.761) v4(107.503,44.761)
  L8_Bottom w0.152: v4(107.503,44.761) 107.337,44.761 C151.1@107.238,44.662 107.238,43.945 107.565,43.618 v1(107.565,43.488)
  other v2: 107.503,44.761
  other v3: 107.503,44.761
ANT1: B2.9 C150.1 | length 14.4
  L1_Top w0.152: v3(105.721,38.5) 107.465,38.5 B2.9@107.503,38.461
  L8_Bottom w0.152: v3(105.721,38.5) 110.709,43.488 v1(114.88,43.488) 114.88,43.58 114.477,43.983 C150.1@114.477,44.662
  other v2: 105.721,38.5
  other v4: 105.721,38.5
AVDD0V8_CSI: U1.L22 | length 0.2
  L1_Top w0.203: U1.L22@63.241,44.249 v1(63.416,44.249)
AVDD08_DP: U1.AJ13 U1.AK13 | length 0.4
  L1_Top w0.203: U1.AK13@67.141,36.049 U1.AJ13@67.141,36.449
AVDD18_DP: U1.AJ14 U1.AJ15 | length 0.4
  L1_Top w0.203: U1.AJ15@66.341,36.449 66.35,36.458 66.461,36.458 66.48,36.477 66.701,36.477 66.729,36.449 U1.AJ14@66.741,36.449
BOOT_CLK: R44.1 U5.M6 | length 2.8
  L1_Top w0.127: U5.M6@48.941,42.849 v1(49.191,43.099)
  L6_Sig3 w0.127: v6(48.688,44.899) 48.741,44.845 48.741,44.322 49.191,43.872 v1(49.191,43.099)
  L8_Bottom w0.127: v6(48.688,44.899) 48.688,45.345 R44.1@48.691,45.349
BOOT_CMD: R48.1 U1.AN23 U5.M5 | length 26.4
  L1_Top w0.127: U5.M5@49.441,42.849 v1(49.691,43.099) ; v4(52.36,42.614) 52.481,42.493 52.481,39.655 v4(52.602,39.534) ; U1.AN23@63.041,34.749 v1(63.041,34.924) ; R48.1@64.441,30.349 64.441,29.601 64.486,29.556 v1(64.486,29.293)
  L3_Sig1 w0.127: v1(49.691,43.099) 49.934,42.857 51.559,42.857 51.802,42.614 v4(52.36,42.614) ; v4(52.602,39.534) 54.956,37.18 v8(60.291,37.18)
  L5_Sig2 w0.127: v8(60.291,37.18) 60.786,37.18 v1(63.041,34.924) 63.041,34.807 64.75,33.098 64.75,32.82 64.486,32.557 v1(64.486,29.293)
BOOT_D0: R45.2 U1.AP21 U5.A3 | length 23.7
  L1_Top w0.04: 61.548,33.675 61.536,33.687 61.536,33.749 v9(61.589,33.802) ; 61.548,33.675 61.552,33.672 cw(c61.441,33.549) 61.574,33.647 ccw(c61.606,33.672) 61.582,33.64 61.592,33.632 61.606,33.632 61.691,33.632 61.773,33.714 63.04,33.714 63.276,33.951 63.276,34.018 63.577,34.318 63.81,34.318 U1.AP21@63.841,34.349
  L1_Top w0.127: U5.A3@50.441,37.349 v1(50.691,37.099) ; v4(53.991,36.935) 54.733,36.194 ; R45.2@54.441,28.349 54.441,28.975 54.733,29.266 v1(54.733,29.405) 54.733,36.194 ; v4(56.21,34.562) 56.21,34.578 55.728,35.06 55.728,35.199 54.733,36.194
  L3_Sig1 w0.127: v1(50.691,37.099) 50.855,36.935 v4(53.991,36.935)
  L6_Sig3 w0.127: v6(59.94,34.257) 60.537,34.257 60.969,33.824 61.566,33.824 v9(61.589,33.802)
  L8_Sig4 w0.127: v3(56.691,34.317) 57.357,34.317 57.373,34.301 59.017,34.301 59.271,34.554 59.642,34.554 v6(59.94,34.257)
  L8_Bottom w0.127: v4(56.21,34.562) 56.455,34.317 v3(56.691,34.317)
  other v2: 56.21,34.562
  other v3: 56.21,34.562
BOOT_D1: R21.1 U1.AP20 U5.A4 | length 21
  L1_Top w0.127: U5.A4@49.941,37.349 v1(50.191,37.099) 50.191,34.995 v1(49.856,34.66) 52.911,34.66 v9(52.994,34.577) ; U1.AP20@64.241,34.349 v1(64.241,34.524)
  L6_Sig3 w0.127: v9(52.994,34.577) 52.998,34.573 55.847,34.573 v6(55.935,34.485) ; v6(64.176,33.672) 64.176,34.459 v1(64.241,34.524)
  L8_Sig4 w0.127: v6(55.935,34.485) 56.437,33.983 62.971,33.983 63.136,34.149 63.136,34.28 63.333,34.476 63.455,34.476 63.852,34.079 v2(64.436,34.079) 64.176,33.819 v6(64.176,33.672)
  L8_Bottom w0.127: R21.1@49.441,33.604 49.441,34.167 49.856,34.582 v1(49.856,34.66)
BOOT_D2: R24.1 R47.1 U1.AN21 U5.A5 | length 67.8
  L1_Top w0.127: U5.A5@49.441,37.349 v1(49.691,37.099) ; U1.AN21@63.841,34.749 63.841,34.782 63.942,34.884 v1(63.942,34.917) ; R24.1@66.472,65.068 66.472,64.523 66.925,64.071 v1(66.925,64.012) 66.925,60.562 68.068,59.418 v4(68.068,55.968)
  L3_Sig1 w0.127: v8(46.066,36.524) 46.066,36.599 46.677,37.209 49.361,37.209 49.471,37.099 v1(49.691,37.099) 49.838,37.246 54.682,37.246 55.024,36.904 61.85,36.904 62.059,37.114 v2(62.191,37.114) ; v8(65.23,34.496) 65.435,34.291 65.864,34.291 65.991,34.163 66.884,34.163 66.887,34.166 67.356,34.166 v8(67.608,34.417)
  L5_Sig2 w0.127: v1(40.306,36.974) 40.756,36.524 v8(46.066,36.524) ; v1(63.942,34.917) 64.376,34.917 64.797,34.496 v8(65.23,34.496) ; v2(66.741,38.449) 66.741,38.113 67.242,37.612 67.242,34.783 v8(67.608,34.417) ; v9(67.024,50.131) 67.024,50.037 67.132,49.929 67.132,47.96 66.908,47.736 66.908,47.503 66.871,47.466 66.871,47.356 66.908,47.319 66.908,45.893 67.061,45.74 67.061,45.617 v2(67.032,45.588)
  L6_Sig3 w0.127: v2(62.191,37.114) 62.269,37.192 62.934,37.192 63.285,36.841 63.356,36.841 63.706,36.491 64.108,36.491 64.288,36.31 64.288,35.79 64.226,35.728 64.226,35.208 63.942,34.925 v1(63.942,34.917) ; v2(66.741,38.449) 66.741,38.7 67.775,39.734 67.775,41.896 67.933,42.054 67.933,42.89 67.908,42.915 67.908,43.197 67.162,43.942 66.978,43.942 66.552,44.368 66.496,44.368 66.176,44.688 66.176,45.587 66.174,45.589 66.174,45.7 66.253,45.778 66.363,45.778 66.365,45.776 66.549,45.776 66.737,45.588 v2(67.032,45.588)
  L8_Bottom w0.127: R47.1@39.15,36.349 40.046,36.349 40.306,36.609 v1(40.306,36.974) ; v9(67.024,50.131) 68.068,51.176 v4(68.068,55.968)
  other v2: 68.068,55.968
  other v3: 68.068,55.968
BOOT_D3: U1.AM21 U5.B2 | length 15.3
  L1_Top w0.127: U5.B2@50.941,37.849 50.941,37.789 51.191,37.539 v1(51.191,37.466) ; U1.AM21@63.841,35.149 v1(63.841,35.324)
  L3_Sig1 w0.127: v2(51.31,35.774) 51.393,35.691 51.393,35.668 51.476,35.584 51.55,35.584 51.615,35.65 61.541,35.65 61.704,35.487 63.679,35.487 v1(63.841,35.324)
  L8_Sig4 w0.127: v3(51.106,36.652) 51.31,36.448 v2(51.31,35.774)
  L8_Bottom w0.127: v3(51.106,36.652) 51.191,36.737 v1(51.191,37.466)
BOOT_D4: B1.5 R16.1 U1.AR23 U5.B3 | length 25
  L1_Top w0.127: U5.B3@50.441,37.849 v1(50.691,37.599) ; v1(58.016,28.254) 62.084,32.322 v9(62.084,32.615) ; v1(62.893,34.203) 62.893,34.131 63.041,33.982 U1.AR23@63.041,33.949
  L6_Sig3 w0.127: v9(62.084,32.615) 62.084,33.004 62.893,33.813 v1(62.893,34.203)
  L8_Sig4 w0.127: v3(50.502,36.162) 50.825,36.485 50.825,37.466
  L8_Sig4 w0.254: v1(50.691,37.599) 50.825,37.466 53.424,34.866 59.991,34.866 60.607,34.25 61.192,34.25 61.267,34.324 62.544,34.324 62.554,34.314 62.754,34.314 62.865,34.203 v1(62.893,34.203)
  L8_Bottom w0.127: R16.1@49.441,36.349 50.219,36.349 50.406,36.162 v3(50.502,36.162) v1(50.597,36.162)
BOOT_D5: B1.2 R18.1 U1.AP23 U5.B4 | length 29.4
  L1_Top w0.127: v1(49.729,37.849) U5.B4@49.941,37.849 v1(50.191,37.599) ; v3(55.704,36.366) 55.875,36.195 55.875,35.121 v4(56.13,34.866) ; v1(63.039,34.524) 63.039,34.352 63.061,34.329 v2(63.394,34.329) ; v2(63.185,32.658) 63.137,32.611 63.114,32.611 63.114,32.401 63.173,32.342 63.173,30.684 64.25,29.607 64.25,28.258 65.995,26.513 65.995,25.876 B1.2@66.157,25.714 ; v1(65.816,25.714) B1.2@66.157,25.714 ; B1.2@66.341,25.714 B1.2@66.157,25.714
  L3_Sig1 w0.127: v4(56.13,34.866) 58.901,34.866 58.973,34.937 59.569,34.937 59.689,34.817 62.16,34.817 62.246,34.731 62.832,34.731 v1(63.039,34.524)
  L8_Sig4 w0.127: v2(63.185,32.658) 63.173,32.67 63.173,33.962 63.283,34.072 63.283,34.219 v2(63.394,34.329)
  L8_Bottom w0.127: R18.1@48.555,39.307 48.555,38.282 48.988,37.849 v1(49.729,37.849) ; v1(50.191,37.599) 50.503,37.599 51.235,38.332 52.157,38.332 53.139,37.349 54.721,37.349 v3(55.704,36.366)
  other v2: 55.704,36.366
  other v4: 63.185,32.658 63.394,34.329 55.704,36.366
BOOT_D6: B1.6 B1.7 R42.1 R43.1 U1.AR24 U5.B5 | length 91.8
  L1_Top w0.127: U5.B5@49.441,37.849 v1(49.691,37.599) ; B1.7@58.541,25.714 v9(58.541,26.984) ; U1.AR24@62.641,33.949 v1(62.641,34.117) ; v2(73.313,38.091) 73.313,38.157 76.047,40.891 79.69,40.891 79.875,40.707 79.875,40.663 80.059,40.478 81.165,40.478 81.577,40.891 v4(82.683,40.891) ; v4(87.615,42.713) 87.615,42.757 v3(87.846,42.988) ; v4(91.366,43.582) 92.117,44.333 94.163,44.333 v3(94.49,44.66) ; v4(103.642,47.938) 107.364,51.66 v1(112.442,51.66) 112.442,51.375 R42.1@112.441,50.604
  L3_Sig1 w0.127: v4(82.683,40.891) 83.152,40.891 83.354,41.092 83.354,41.094 84.601,42.341 86.186,42.341 86.297,42.453 86.919,42.453 87,42.372 87.073,42.372 87.153,42.453 87.355,42.453 v4(87.615,42.713)
  L6_Sig3 w0.127: v9(58.541,26.984) 61.736,30.179 61.736,33.863 61.403,34.195 61.403,34.515 ; v6(61.226,34.705) 61.409,34.522 61.506,34.425 61.506,34.271 61.786,33.991 62.515,33.991 v1(62.641,34.117) ; v6(63.745,35.904) 64.09,36.249 v2(64.141,36.249)
  L8_Sig4 w0.127: v1(50.475,36.974) 50.31,36.974 50.301,36.966 50.136,36.966 49.691,37.41 v1(49.691,37.599) 50.003,37.599 50.213,37.81 53.117,37.81 55.736,35.191 60.74,35.191 v6(61.226,34.705) 61.894,34.705 61.924,34.675 62.592,34.675 63.066,35.149 63.105,35.149 63.472,35.516 63.557,35.516 63.635,35.594 63.635,35.679 63.745,35.789 v6(63.745,35.904) ; v2(64.141,36.249) 64.562,35.829 65.351,35.829 65.439,35.917 65.91,35.917 65.912,35.916 66.222,35.916 66.553,36.247 66.636,36.247 66.729,36.34 66.964,36.34 67.576,35.728 68.895,35.728 68.905,35.738 68.978,35.738 68.988,35.728 v3(69.971,35.728)
  L8_Bottom w0.127: v1(50.475,36.974) 51.1,36.349 R43.1@52.441,36.349 ; v3(69.971,35.728) 71.709,35.728 71.87,35.889 72.048,35.889 72.055,35.882 72.277,35.882 72.284,35.889 73.607,35.889 73.802,36.083 73.802,36.845 73.09,37.557 73.09,37.868 v2(73.313,38.091) ; v3(87.846,42.988) 88.44,43.582 v4(91.366,43.582) ; v3(94.49,44.66) 97.768,47.938 v4(103.642,47.938)
  other v2: 87.846,42.988 91.366,43.582 94.49,44.66 103.642,47.938
  other v3: 73.313,38.091 91.366,43.582 103.642,47.938
  other v4: 73.313,38.091 87.846,42.988 94.49,44.66
  other v6: 64.141,36.249
BOOT_D7: B1.3 U1.AP24 U5.B6 | length 31.8
  L1_Top w0.04: v1(49.191,37.599) 49.191,37.207 49.819,36.58 v4(49.819,35.706)
  L1_Top w0.127: U5.B6@48.941,37.849 v1(49.191,37.599) ; U1.AP24@62.641,34.349 v1(62.641,34.524) ; v4(64.372,32.318) 65.33,31.36 65.898,31.36 67.272,29.985 67.272,29.833 66.537,29.098 66.367,29.098 65.631,28.362 65.631,27.444 65.954,27.122 66.729,27.122 v1(66.866,26.984)
  L5_Sig2 w0.04: v2(62.029,33.693) 62.029,34.556 62.462,34.989 62.548,34.989 62.641,34.896 v1(62.641,34.524)
  L8_Sig4 w0.04: v4(49.819,35.706) 51.932,33.593 61.929,33.593 v2(62.029,33.693)
  L8_Sig4 w0.127: v1(62.641,34.524) 62.65,34.524 62.795,34.669 63.468,34.669 63.498,34.7 63.609,34.7 63.688,34.62 63.688,34.559 64.022,34.226 64.496,34.226 64.583,34.14 64.583,33.514 64.781,33.316 64.891,33.316 64.986,33.411 65.097,33.411 65.283,33.224 65.283,32.857 64.744,32.318 v4(64.372,32.318)
  other v2: 64.372,32.318 49.819,35.706
BOOT_DCLK: U1.AP26 | length 0.2
  L1_Top w0.127: U1.AP26@61.841,34.349 v1(61.841,34.524)
BOOT_DQS: R50.2 U1.AN24 U5.H5 | length 35.5
  L1_Top w0.127: R50.2@49.441,24.058 49.441,24.722 49.856,25.136 v1(49.856,25.214) 51.218,26.576 v4(51.337,26.576) ; U5.H5@49.441,40.849 v1(49.691,41.099) ; v1(62.505,34.885) U1.AN24@62.641,34.749
  L5_Sig2 w0.127: v9(62.392,32.736) 62.392,34.772 v1(62.505,34.885)
  L8_Sig4 w0.254: v1(49.691,41.099) 50.125,41.099 55.698,35.527 58.845,35.527 58.86,35.542 59.023,35.542 59.038,35.527 62.175,35.527 62.505,35.196 v1(62.505,34.885)
  L8_Bottom w0.127: v4(51.337,26.576) 56.527,26.576 62.392,32.441 v9(62.392,32.736)
  other v2: 51.337,26.576
  other v3: 51.337,26.576
BOOT_GPIOB_9: U1.AR26 | length 0.2
  L1_Top w0.127: U1.AR26@61.841,33.949 v1(61.841,34.124)
BOOT_GPIOB_12: U1.AM24
BOOT_RST_N: U5.K5
BT_EN: B2.38 U1.G21 | length 59.8
  L1_Top w0.1: v1(63.699,45.822) 63.741,45.822 U1.G21@63.741,45.949 ; B2.38@119.641,47.349 v1(119.641,48.481)
  L3_Sig1 w0.1: v1(63.699,45.822) 63.699,47.541 63.724,47.566 64.639,47.566 64.771,47.699 64.771,47.749 64.942,47.919 65.769,47.919 65.814,47.964 65.975,47.964 65.991,47.949 66.013,47.949 66.088,47.874 66.272,47.874 66.344,47.946 67.576,47.946 67.626,47.896 69.544,47.896 69.717,48.069 109.627,48.069 110.035,47.662 118.822,47.662 v1(119.641,48.481)
BT_WAKE_HOST: R52.2 U1.E17 | length 15.9
  L1_Top w0.1: v1(65.366,46.969) 65.413,46.922 65.413,46.778 U1.E17@65.441,46.749
  L5_Sig2 w0.1: v1(65.366,46.969) 65.366,46.758 65.536,46.588 65.693,46.588 65.7,46.595 65.858,46.595 66.004,46.448 66.004,46.212 66.151,46.066 66.216,46.066 66.429,45.852 66.429,45.162 66.016,44.749 66.016,42.529 66.692,41.854 67.11,41.854 67.375,42.119 67.493,42.119 68.161,41.45 68.161,40.474 68.1,40.413 68.1,39.693 68.31,39.484 68.352,39.484 68.561,39.274 68.561,38.913 68.366,38.718 68.366,38.189 v2(69.195,37.36)
  L6_Sig3 w0.1: v1(68.471,36.244) 68.513,36.286 68.513,36.974 68.705,37.167 68.827,37.167 69.02,37.36 v2(69.195,37.36)
  L8_Bottom w0.1: R52.2@68.441,35.099 68.441,35.904 68.531,35.994 68.531,36.089 68.471,36.149 v1(68.471,36.244)
BTPCM_CLK: B2.44 U1.B20 | length 51.3
  L1_Top w0.1: v1(64.232,47.769) 64.241,47.778 U1.B20@64.241,47.949 ; B2.44@114.241,47.349 114.241,47.987 v1(114.245,47.991)
  L3_Sig1 w0.1: v1(64.232,47.769) 64.519,48.056 65.693,48.056 65.736,48.099 65.943,48.099 65.957,48.113 67.578,48.113 67.675,48.016 69.494,48.016 69.667,48.189 109.752,48.189 110.16,47.782 114.036,47.782 v1(114.245,47.991)
BTPCM_DIN: B2.47 U1.B19 | length 49.3
  L1_Top w0.1: U1.B19@64.641,47.949 v1(64.891,47.699) ; v1(110.986,46.195) 111.541,46.75 B2.47@111.541,47.349
  L3_Sig1 w0.1: v1(64.891,47.699) 65.121,47.469 65.121,47.011 65.116,47.005 65.116,46.905 65.121,46.899 65.121,46.809 65.556,46.374 69.819,46.374 70.201,45.991 74.134,45.991 74.184,46.042 74.646,46.042 74.696,45.991 79.345,45.991 79.761,46.407 81.739,46.407 81.789,46.457 83.479,46.457 83.528,46.507 84.178,46.507 84.277,46.407 85.046,46.407 85.259,46.195 v1(110.986,46.195)
BTPCM_DOUT: B2.46 U1.A19 | length 50.1
  L1_Top w0.1: v1(64.639,48.236) 64.639,48.347 U1.A19@64.641,48.349 ; v1(110.968,49.751) 112.441,48.277 B2.46@112.441,47.349
  L3_Sig1 w0.1: v1(64.639,48.236) 64.699,48.236 64.849,48.386 65.228,48.386 65.263,48.351 65.393,48.351 65.625,48.583 65.654,48.583 66.336,49.265 67.523,49.265 68.02,49.762 78.36,49.762 78.372,49.751 v1(110.968,49.751)
BTPCM_SYNC: B2.45 U1.C19 | length 55.7
  L1_Top w0.1: v1(64.641,47.374) U1.C19@64.641,47.549 ; v1(113.341,46.737) B2.45@113.341,47.349
  L5_Sig2 w0.1: v2(70.849,48.899) 71.781,48.899 71.833,48.952 72.049,48.952 72.102,48.899 77.619,48.899 v2(77.891,48.627) ; v2(108.845,48.642) 110.75,46.737 v1(113.341,46.737)
  L6_Sig3 w0.1: v6(66.88,46.753) 67.04,46.753 67.386,47.099 67.386,47.305 67.042,47.649 66.799,47.649 66.664,47.514 66.212,47.514 65.97,47.757 65.97,47.8 65.876,47.894 65.77,47.894 65.677,47.987 65.677,48.061 65.737,48.121 66.598,48.121 66.646,48.169 66.893,48.169 66.941,48.121 66.962,48.121 66.992,48.091 67.405,48.091 67.48,48.166 67.894,48.166 67.908,48.152 68.439,48.152 69.186,48.899 v2(70.849,48.899) ; v2(77.891,48.627) 108.83,48.627 v2(108.845,48.642)
  L8_Bottom w0.1: v1(64.641,47.374) 64.641,47.09 64.724,47.007 65.008,47.007 65.421,46.595 66.037,46.595 66.071,46.561 66.548,46.561 66.572,46.585 66.635,46.585 66.659,46.561 66.687,46.561 v6(66.88,46.753)
BTUART_C_CTS_N: B2.42 U1.E18 | length 60
  L1_Top w0.04: v4(64.891,45.549) 64.876,45.564 64.876,46.018 65.008,46.149 65.075,46.149 65.206,46.281 65.206,46.418 65.082,46.542 65.082,46.652 65.072,46.662 v4(65.041,46.662) ; U1.E18@65.041,46.749 65.075,46.749 v3(65.286,46.538)
  L1_Top w0.1: v1(65.041,46.574) U1.E18@65.041,46.749 ; v4(103.917,47.52) 105.362,46.075 114.778,46.075 116.041,47.338 v1(116.041,47.962)
  L3_Sig1 w0.1: v4(64.891,45.549) 65.417,45.024 v2(66.57,45.024)
  L6_Sig3 w0.1: v2(66.57,45.024) 67,45.455 68.573,45.455 69.287,46.169 70.088,46.169 70.47,46.552 70.47,46.605 70.77,46.904 71.241,46.904 72.135,47.798 81.499,47.798 82.07,47.228 86.304,47.228 87.789,45.742 87.789,45.403 88.949,44.243 89.005,44.243 89.219,44.029 89.219,43.947 v6(89.408,43.758)